# Altium PCB alarm_clock.PcbDoc
Units mil, origin at the board's own origin, x right, y up, seen from the top; angles counter-clockwise.
Board outline 3543.31 x 2637.8 mil, 2 copper layers (Top Layer, Bottom Layer); 15 components, 14 nets, 76 pads, 0 vias.
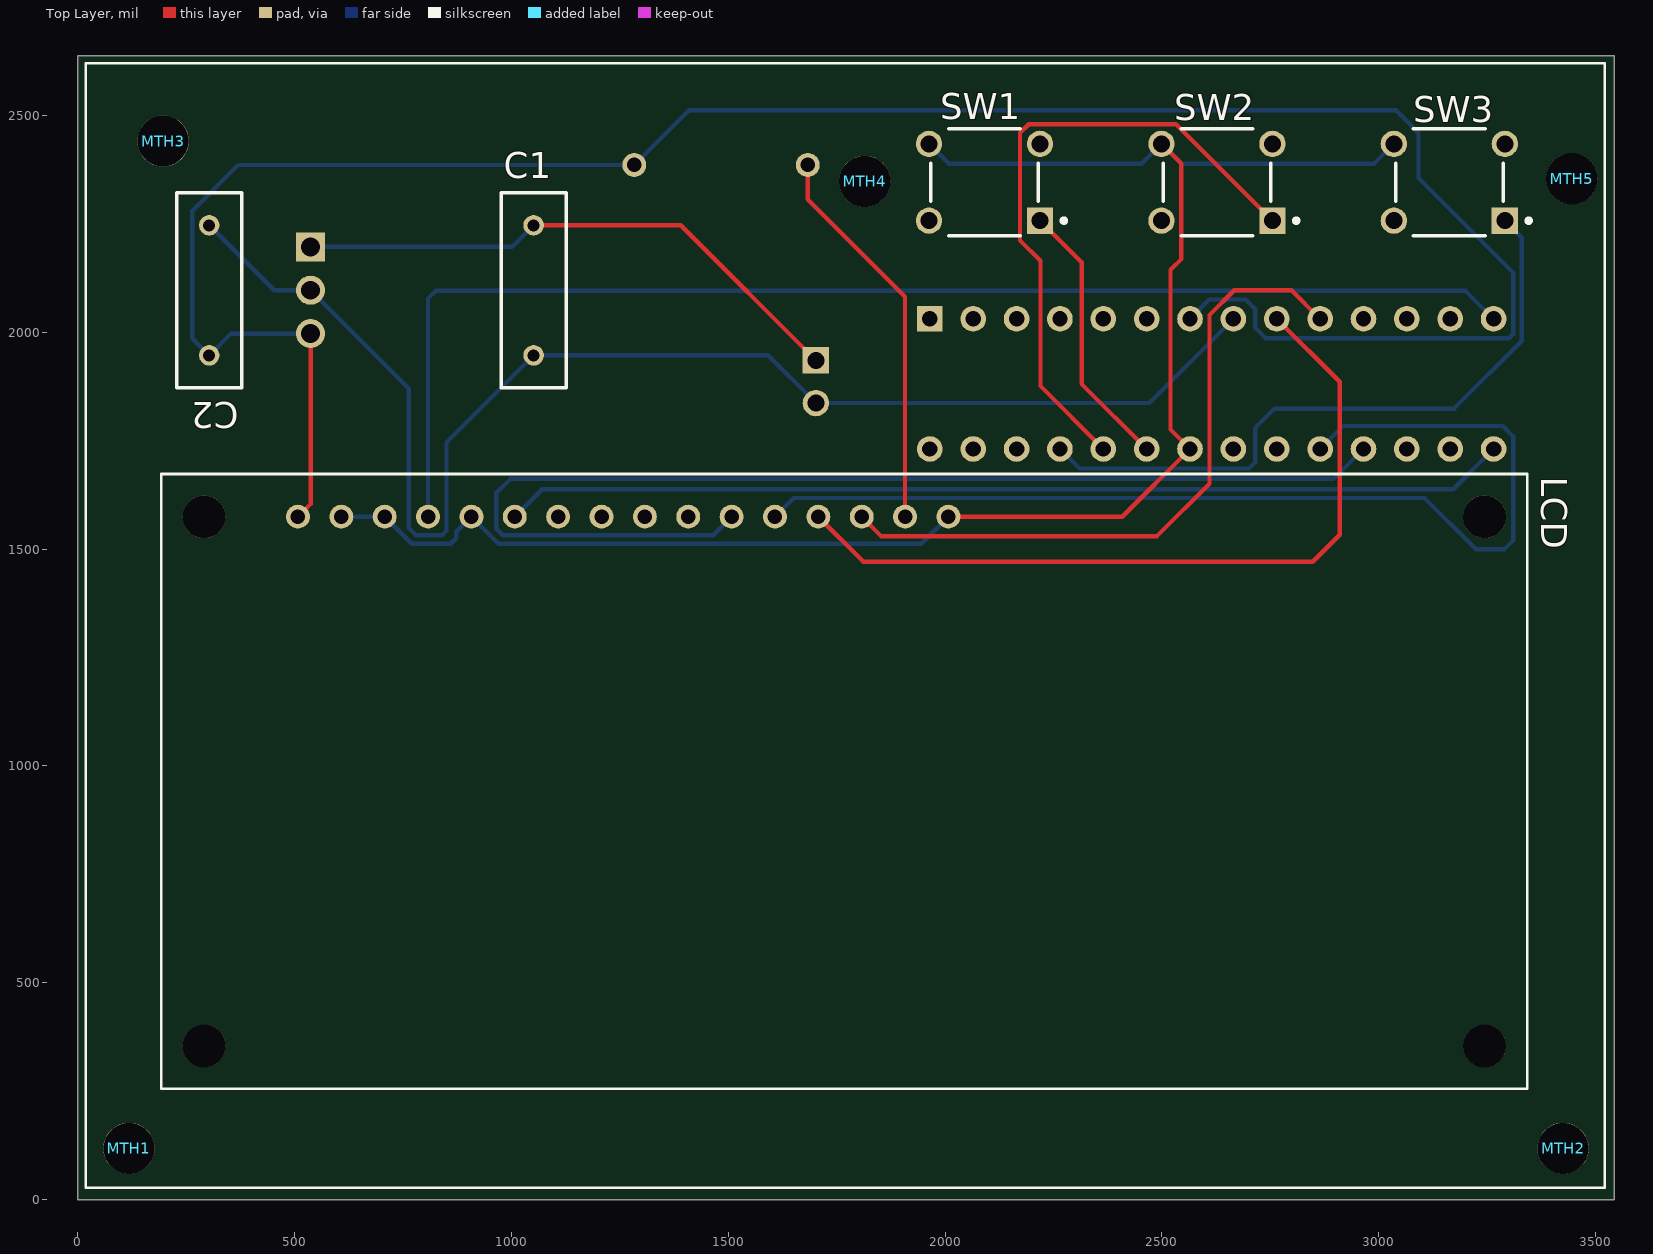
[diagram p0: Top Layer view]
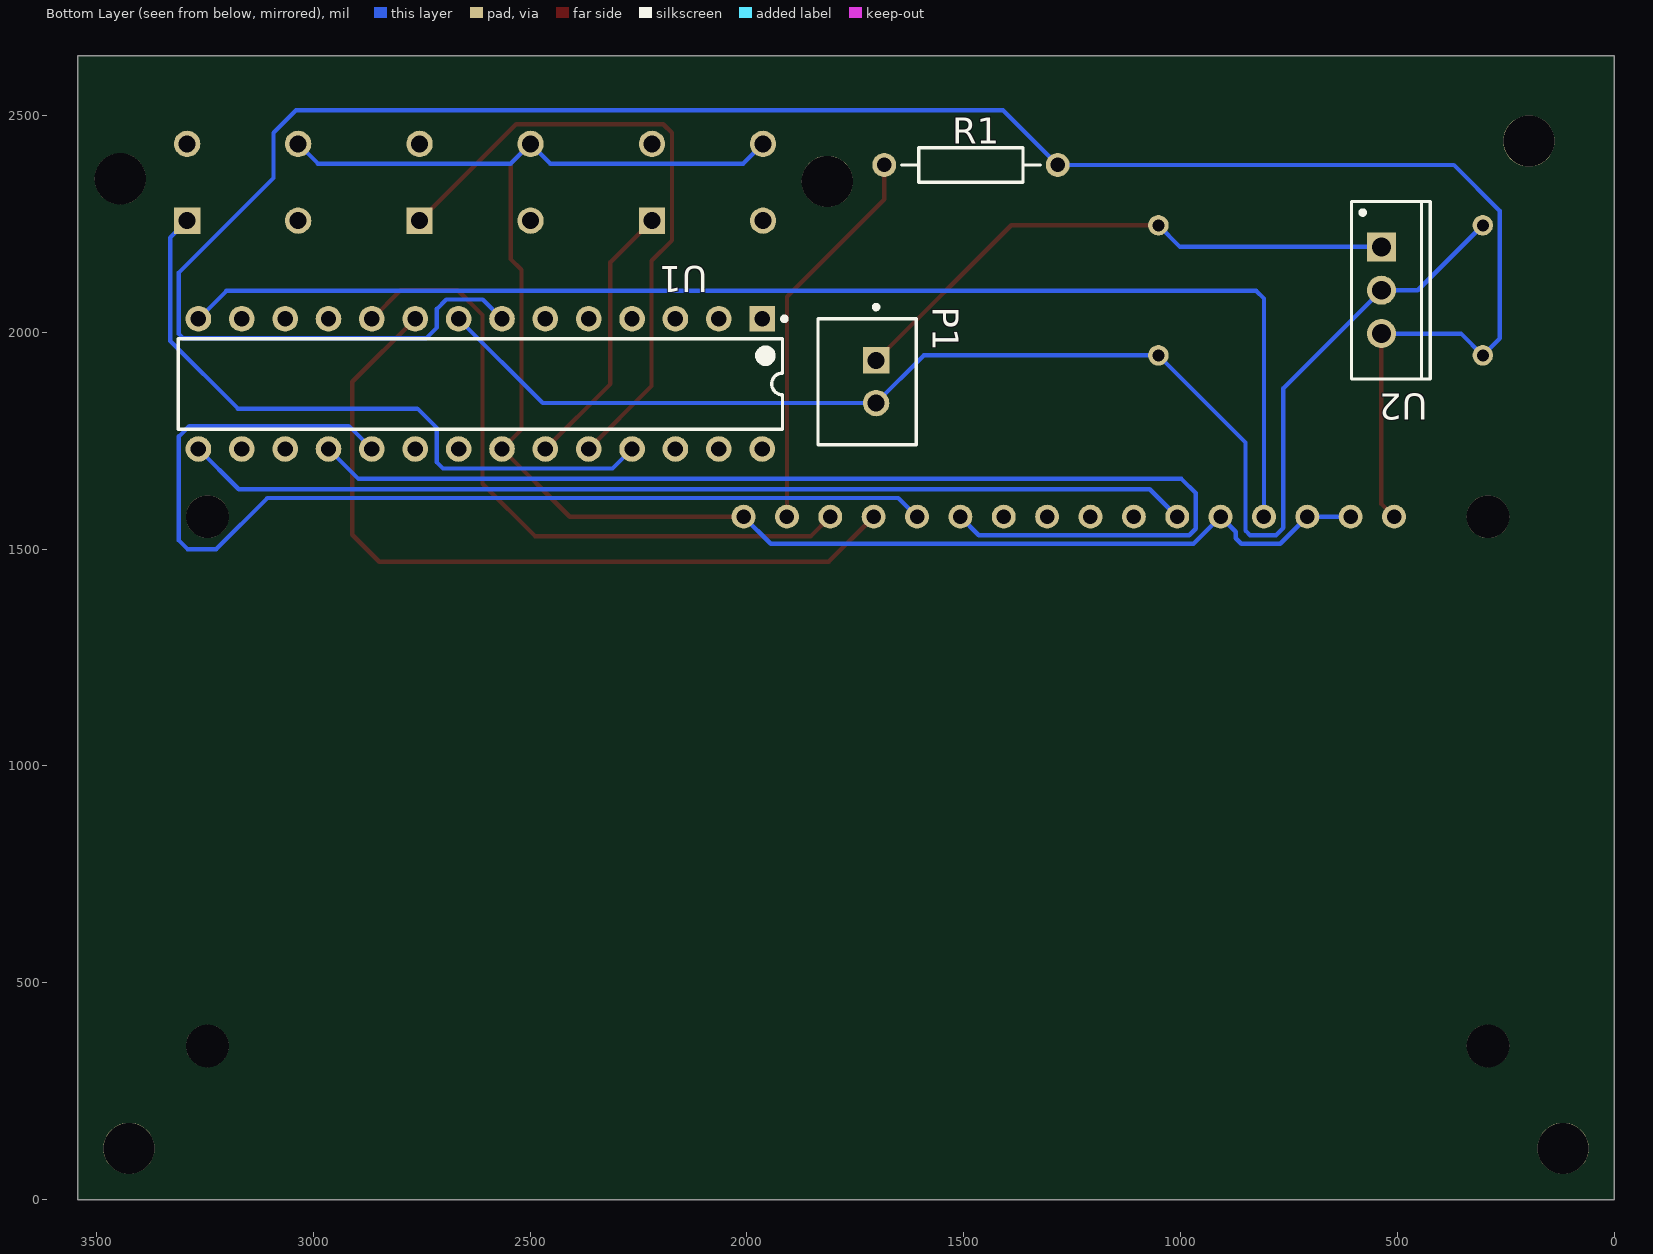
[diagram p1: Bottom Layer view, seen from below]
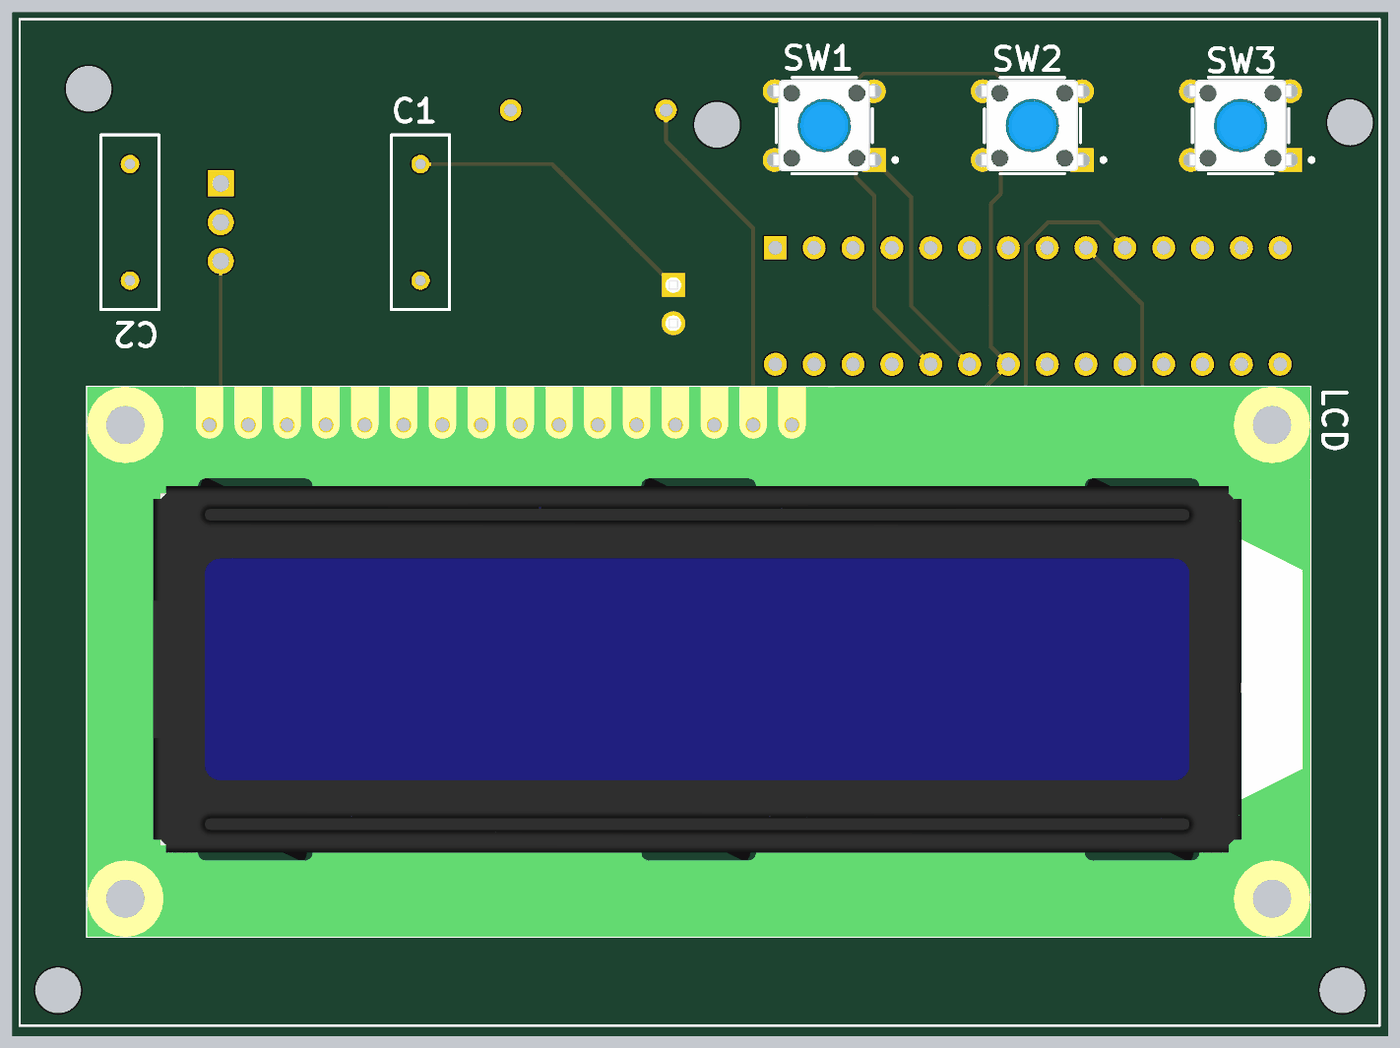
[diagram p2: 3D render of the assembled board from above, using the file's embedded part models]

## Layer stack, top to bottom
Top Solder: solder mask 0.4, Solder Resist, Dk 3.5
Top Layer: signal copper 1.4
Dielectric 1: dielectric 12.6, FR-4, Dk 4.8
Bottom Layer: signal copper 1.4
Bottom Solder: solder mask 0.4, Solder Resist, Dk 3.5

## Board outline
0,0 3543.31,0 3543.31,2637.8 0,2637.8 0,2322.83

## Design rules (kind name [scope] priority, off if disabled: settings)
Clearance [All] p1: gap=10 ignorepadtopadclearanceinfootprint=FALSE except(0: Arc-Hole Track-Hole SMDPad-Hole THPad-Hole Via-Hole Fill-Hole Poly-Hole Region-Hole Text-Hole)
PolygonConnect [All] p1: connectstyle=Relief reliefconductorwidth=10 reliefentries=4 polygonreliefangle="90 Angle" airgapwidth=10
RoomDefinition alarm_clock [InComponentClass('alarm_clock')] p1: confinementstyle=ConfineIn formatcopy=TRUE lockcomponents=FALSE outline -1000,-1000 1000,-1000 1000,0 -1000,0
RoutingVias [All] p1: holewidth=28 width=50 viastyle="Through Hole" minholewidth=28 minwidth=50 maxholewidth=28 maxwidth=50
SolderMaskExpansion [All] p1: expansion=4 istentingtop=FALSE
Width [All] p1: maxlimit=10 minlimit=10 preferedwidth=10
30 further rules are at their usual default settings.

## Components (designator, comment, footprint, x,y, rotation, side; value= is the part's Value field where it differs from the comment)
C1 "Cap" RAD-0.3 1051.24,2096.76 r90 top value=330nF
C2 "Cap" RAD-0.3 303.21,2096.76 r270 top value=100nF
LCD "16x2 LCD Display" LCD1602 1767.72,944.88 r0 top
MTH1 "" MTH 118.11,118.11 r0 top
MTH2 "" MTH 3425.2,118.11 r90 top
MTH3 "" MTH 196.85,2440.94 r90 top
MTH4 "" MTH 1815,2348 r90 top
MTH5 "" MTH 3445,2354 r90 top
P1 "B2B-XH-A(LF)(SN)" FP-B2B-XH-A_LF_SN-MFG 1723,1886 r270 bottom
R1 "Res2" AXIAL-0.4 1483.46,2385.83 r180 bottom value=1K
SW1 "Increase" FP-1-1825910-0-MFG 2091,2346 r0 top
SW2 "Decrease" FP-1-1825910-0-MFG 2627,2346 r0 top
SW3 "Reset" FP-1-1825910-0-MFG 3163,2346 r0 top
U1 "ATmega328P-PU" 28P3 2615,1881 r270 bottom
U2 "L7805CV" TO220 537,2097 r270 bottom

## Footprints (in the part's own frame and the unit in brackets; to place one, negate y for a bottom-side part, rotate by r counter-clockwise, add the part's x,y. Pads: shape width x height; smd on the part's side, far side on the other; paste and mask are expansions set on the pad)
28P3 [mm] "28-Pin Plastic Dual In-Line Package (PDIP)"
  rect 1.5x1.5 hole 0.9: 1(-3.81,16.51)
  round 1.5 hole 0.9: 2(-3.81,13.97) 3(-3.81,11.43) 4(-3.81,8.89) 5(-3.81,6.35) 6(-3.81,3.81) 7(-3.81,1.27) 8(-3.81,-1.27) 9(-3.81,-3.81) 10(-3.81,-6.35) 11(-3.81,-8.89) 12(-3.81,-11.43) 13(-3.81,-13.97) 14(-3.81,-16.51) 15(3.81,-16.51) 16(3.81,-13.97) 17(3.81,-11.43) 18(3.81,-8.89) 19(3.81,-6.35) 20(3.81,-3.81) 21(3.81,-1.27) 22(3.81,1.27) 23(3.81,3.81) 24(3.81,6.35) 25(3.81,8.89) 26(3.81,11.43) 27(3.81,13.97) 28(3.81,16.51)
  silkscreen extent -3.93,-17.7 2.65,17.93, body extent -3.6,-17.65 3.6,17.65, height 4.58
AXIAL-0.4 [mm] "Axial Device, Thru-Hole; 2 Leads; 0.4 in Pin Spacing"
  round 1.4 hole 0.85: 1(-5.08,0) 2(5.08,0)
  silkscreen extent -4.06,-1.02 4.06,1.02
FP-1-1825910-0-MFG [mm]
  rect 1.54x1.54 hole 0.99 paste-1000 mask+0: 1(3.25,-2.25)
  round 1.54 hole 0.99 paste-1000 mask+0: 2(-3.25,-2.25) 3(3.25,2.25) 4(-3.25,2.25)
  silkscreen extent -3.14,-3.14 4.77,3.14, body extent -4.12,-3.24 4.12,3.24, height 0.25
FP-B2B-XH-A_LF_SN-MFG [mm]
  rect 1.55x1.55 hole 1 paste-1000 mask+0: 1(-1.25,0.525)
  round 1.55 hole 1 paste-1000 mask+0: 2(1.25,0.525)
  silkscreen extent -4.5,-2.87 3.7,2.88, body extent -3.7,-2.88 3.7,2.88, height 7
LCD1602 [mm] "16x2 LCD"
  round 1.4 hole 0.85: 1(-32,16) 2(-29.46,16) 3(-26.92,16) 4(-24.38,16) 5(-21.84,16) 6(-19.3,16) 7(-16.76,16) 8(-14.22,16) 9(-11.68,16) 10(-9.14,16) 11(-6.6,16) 12(-4.06,16) 13(-1.52,16) 14(1.02,16) 15(3.56,16) 16(6.1,16)
  round 2.5 hole 2.5 unplated: ""(-37.5,-15) ""(-37.5,16) ""(37.5,-15) ""(37.5,16)
  silkscreen extent -40,-17.5 40,18.5, body extent -40,-17.5 40,18.5, height 10.76
MTH [mm] "Mounting Hole 3mm Diameter"
  round 3 hole 3 unplated: ""(0,0)
RAD-0.3 [mm] "Radial Cap, Thru-Hole; 2 Leads; 0.3 in Pin Spacing"
  round 1.2 hole 0.7: 1(-3.81,0) 2(3.81,0)
  silkscreen extent -5.71,-1.9 5.72,1.91
TO220 [mm] "TO, Thru-Hole, Vertical, Heatsink Mounted; 3 In-Line Leads; Pitch 2.54 mm"
  rect 1.7x1.7 hole 1.1: 1(-2.54,0)
  round 1.7 hole 1.1: 2(0,0) 3(2.54,0)
  silkscreen extent -5.2,-1.75 5.2,2.85, body extent -5.25,-1.8 5.25,2.9, height 19.7

## Part data
C1 C2: "Capacitor", LatestRevisionDate=17-Jul-2002, LatestRevisionNote="Re-released for DXP Platform.", PackageDescription="Radial Cap, Thru-Hole; 2 Leads; 0.3 in Pin Spacing", PackageReference=RAD-0.3, Published=8-Jun-2000, Publisher="Altium Limited"
LCD: library part LCD1602
MTH1 MTH2 MTH3 MTH4 MTH5: library part MTH
P1: library part CMP-2000-05888-3, "CONN HEADER VERT 2POS 2.5MM", Color=Natural, Contact Resistance=20mR, Current Rating=3A, Housing Color=White, Insulation Resistance=1GR, Max Operating Temperature=85°C, Max Voltage Rating (AC)=250V, Min Operating Temperature=-25°C, Connector Type="Male Pin", Contact Material=Brass, Contact Plating=Tin, Contact Type="Male Pin", Depth=5.75mm, Fastening Type=Detent, Housing Material=Polyamide, Lead Free="Lead Free", Lead Pitch=2.5mm, Length=7.4mm, Max Current Rating=3A, Max Voltage Rating (DC)=250V, Mount="Through Hole", Number of Contacts=2, Number of Positions=2, Number of Rows=1, Orientation=Straight, Packaging=Bulk, Pitch=2.5mm, REACH SVHC="No SVHC", Series=XH, Termination=Solder, Voltage Rating=250V, Voltage Rating (AC)=250V, Wire/Cable Gauge=22AWG
R1: "Resistor", LatestRevisionDate=17-Jul-2002, LatestRevisionNote="Re-released for DXP Platform.", PackageDescription="Axial Device, Thru-Hole; 2 Leads; 0.4 in Pin Spacing", PackageReference=AXIAL-0.4, Published=8-Jun-2000, Publisher="Altium Limited"
SW1 SW2 SW3: library part CMP-03407-000018-1, "SWITCH TACTILE SPST-NO 0.05A 24V", Actuator Color=Blue, Contact Current Rating=50mA, Contact Resistance=100mR, Max Operating Temperature=85°C, Max Voltage Rating (DC)=24V, Min Operating Temperature=-35°C, Operating Force=1.56N, Package Quantity=750, Actuator Length=3.4mm, Actuator Material=Nylon, Actuator Type=Standard, Contact Material=Brass, Contact Plating=Silver, Depth=5.99mm, Electrical Life=100000Cycles, Illumination Type=Non-Illuminated, Length=5.99mm, Max Current Rating=50mA, Mechanical Life=100000Cycles, Mount="Through Hole", Orientation=Straight, Packaging="Loose Piece", Radiation Hardening=No, RoHS Compliant=Yes, Series="FSMJ, Alcoswitch", Switch Function=Off-Mom, Switch Travel=0.25mm, Termination="PC Pins", Throw Configuration=SPST, Type=Switch, Voltage Rating (DC)=24V
U1: library part CMP-0095-00013-2, "8-bit AVR Microcontroller, 32KB Flash, 1KB EEPROM, 2KB SRAM, 28-pin PDIP, Industrial Grade (-40°C to 85°C)", ComponentLink1Description="Manufacturer URL", ComponentLink1URL=http://www.atmel.com/, ComponentLink2Description="ATmega48A/48PA/88A/88PA/168A/168PA/328/328P Datasheet", ComponentLink2URL=http://www.atmel.com/dyn/resources/prod_documents/8271.pdf, ComponentLink3Description="ATmega48A/48PA/88A/88PA/168A/168PA/328/328P Summary", ComponentLink3URL=http://www.atmel.com/dyn/resources/prod_documents/8271S.pdf, DatasheetVersion="revD, May-2011", PackageDescription="28-lead (0.300\"/7.62mm Wide) Plastic Dual Inline Package (PDIP)", PackageReference=28P3, PackageVersion="revB, Sep-2001", RevisionNote="DatasheetVersion updated. URLs added."
U2: library part CMP-0244-00483-1, "Positive Voltage Regulator, 5V, 3-Pin TO-220", ComponentLink1Description="Manufacturer URL", ComponentLink1URL=http://www.st.com, ComponentLink2Description=Datasheet, ComponentLink2URL=http://www.st.com/internet/com/TECHNICAL_RESOURCES/TECHNICAL_LITERATURE/DATASHEET/CD00000444.pdf, ComponentLink3Description="Package Specification", ComponentLink3URL=http://www.st.com/internet/com/TECHNICAL_RESOURCES/TECHNICAL_LITERATURE/PACKAGE_INFORMATION/CD00004649.pdf, DatasheetVersion=16/11/2011, PackageDescription="TO, Thru-Hole, Vertical, Heatsink Mounted; 3 In-Line Leads; Pitch 2.54 mm", PackageReference=TO220, PackageVersion=ver3.0

## Nets (pads, with @x,y where several pads share a name; then routed paths per layer and width w, separated by ;. In a path a pad name is that pad's centre, name@x,y a point inside that pad or via, vN(x,y) a via of type N, cw(c..) or ccw(c..) an arc to the next point about the centre after c; other vN are vias at no path point)
NetC1_1: C1.1 C2.1 P1.2 U1.8 U2.2 | length 3263
  Bottom Layer w10: C2.1 452.97,2097 U2.2 763,1871 763,1549.24 780,1532.24 840,1532.24 850.43,1542.68 850.43,1745.95 C1.1 1592.36,1946.76 P1.2 2470.79,1836.79 U1.8
NetC1_2: C1.2 P1.1 U2.1 | length 1315
  Top Layer w10: C1.2 1390.79,2246.76 P1.1
  Bottom Layer w10: U2.1 1001.49,2197 C1.2
NetC2_2: C2.2 LCD.1 R1.2 U1.7 U2.3 | length 5368.1
  Top Layer w10: LCD.1 537,1603.93 U2.3
  Bottom Layer w10: U2.3 353.46,1997 C2.2 264,1985.97 264,2280 369.83,2385.83 R1.2 1409.64,2512 3040,2512 3092,2460 3092,2356 3310,2138 3310,1996 3300,1986 2740,1986 2715,2011 2715,2054 2693.47,2075.53 2609.53,2075.53 U1.7
NetLCD_2: LCD.2 LCD.3 LCD.5 LCD.16 SW1.4 SW2.4 SW3.4 U1.22 | length 4033.2
  Top Layer w10: LCD.16 2408.8,1574.8 U1.22 2520,1776 2520,2144 2545,2169 2545,2388.63 SW2.4
  Bottom Layer w10: LCD.2 LCD.3 770.43,1512.24 860,1512.24 873.05,1525.29 873.05,1539.98 LCD.5 970.43,1512.24 1945.31,1512.24 LCD.16 ; SW1.4 2008.63,2389 2453.47,2389 SW2.4 2544.63,2389 2989.47,2389 SW3.4
NetLCD_4: LCD.4 U1.14 | length 2994.2
  Bottom Layer w10: LCD.4 807.87,2077.87 825.53,2095.53 3200.47,2095.53 U1.14
NetLCD_6: LCD.6 U1.15 | length 2321.8
  Bottom Layer w10: LCD.6 1071.07,1638 3172,1638 U1.15
NetLCD_11: LCD.11 U1.18 | length 2690.5
  Bottom Layer w10: LCD.11 1465.31,1532.24 980,1532.24 965.31,1546.93 965.31,1629.31 998,1662 2896,1662 U1.18
NetLCD_12: LCD.12 U1.19 | length 2494.1
  Bottom Layer w10: LCD.12 1651.07,1618 3106,1618 3224,1500 3290,1500 3310,1520 3310,1760 3286,1784 2918,1784 U1.19
NetLCD_13: LCD.13 U1.9 | length 1828.9
  Top Layer w10: LCD.13 1811.68,1471 2848,1471 2910,1533 2910,1886 U1.9
NetLCD_14: LCD.14 U1.10 | length 1565.8
  Top Layer w10: LCD.14 1852.68,1530 2489,1530 2610,1651 2610,2040 2667,2097 2799,2097 U1.10
NetLCD_15: LCD.15 R1.1 | length 904
  Top Layer w10: R1.1 1683.46,2306.54 1907.87,2082.13 LCD.15
NetSW1_1: SW1.1 U1.23 | length 628.3
  Top Layer w10: SW1.1 2315,2161.37 2315,1881 U1.23
NetSW2_1: SW2.1 U1.24 | length 1491
  Top Layer w10: U1.24 2220,1876 2220,2165 2173,2212 2173,2460 2193,2480 2532.37,2480 SW2.1
NetSW3_1: SW3.1 U1.25 | length 1545.3
  Bottom Layer w10: U1.25 2310,1686 2701,1686 2715,1700 2715,1779 2760,1824 3174,1824 3330,1980 3330,2218.37 SW3.1
pads on no net: LCD. LCD.7 LCD.8 LCD.9 LCD.10 MTH1. MTH2. MTH3. MTH4. MTH5. SW1.2 SW1.3 SW2.2 SW2.3 SW3.2 SW3.3 U1.1 U1.2 U1.3 U1.4 U1.5 U1.6 U1.11 U1.12 U1.13 U1.16 U1.17 U1.20 U1.21 U1.26 U1.27 U1.28

## Silkscreen, mask and mechanical layers (free items; w line width, h text height)
Top Overlay:
  lines w5.91: 19,27 3521,27 3521,2620 19,2620 19,2341.83 19,27